# Altium PCB PCB1.PcbDoc
Units mm, origin at the board's own origin, x right, y up, seen from the top; angles counter-clockwise.
Board outline 17.78 x 33.02 mm, 4 copper layers (Top Copper, GND Layer, PW Player, Bottom Copper), stack 1.17 mm thick; 29 components, 18 nets, 98 pads, 47 vias.
Unrouted connection lines stored in the file: 3.
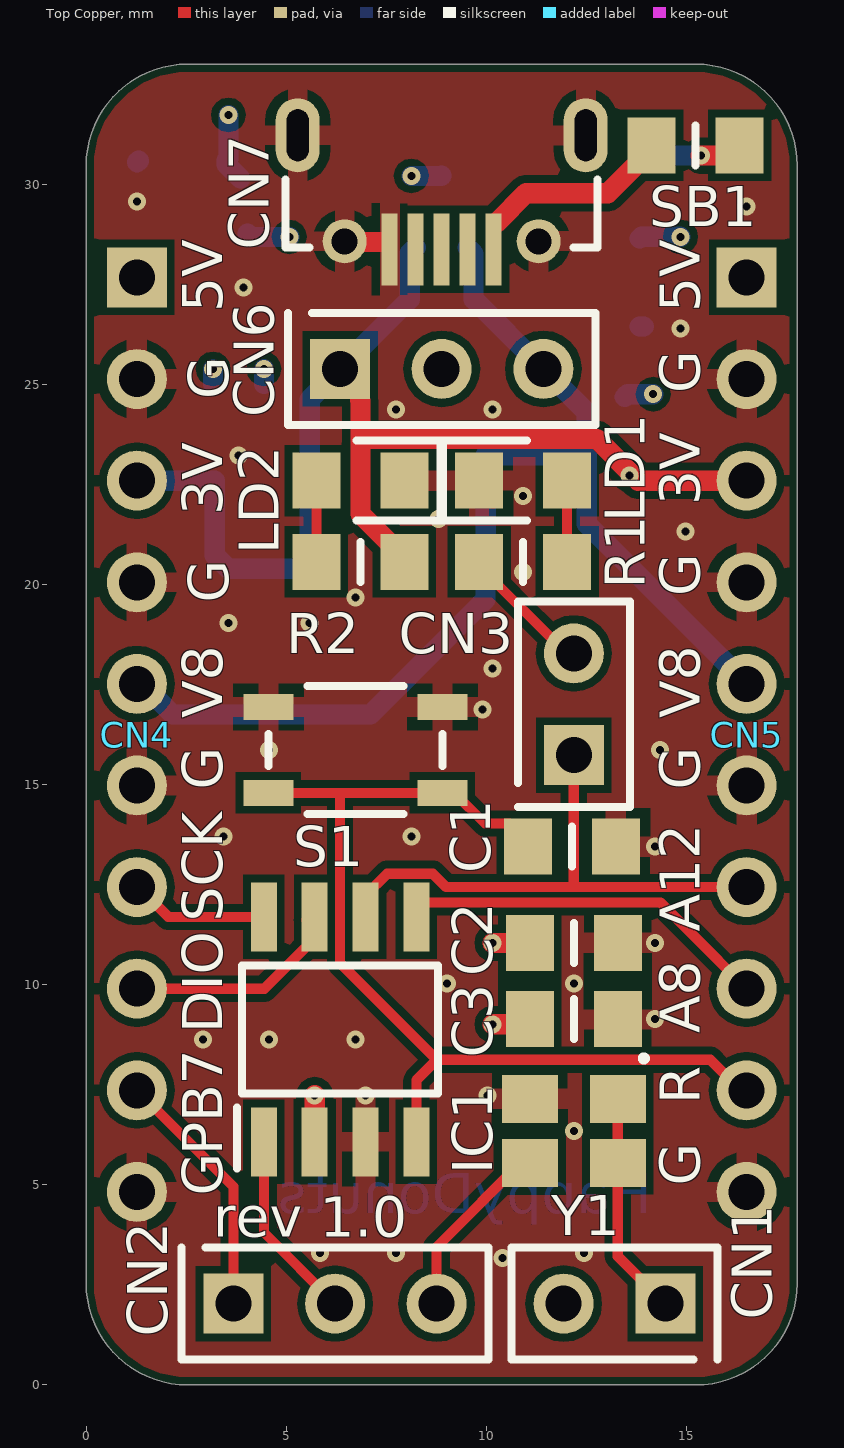
[diagram p0: Top Copper view]
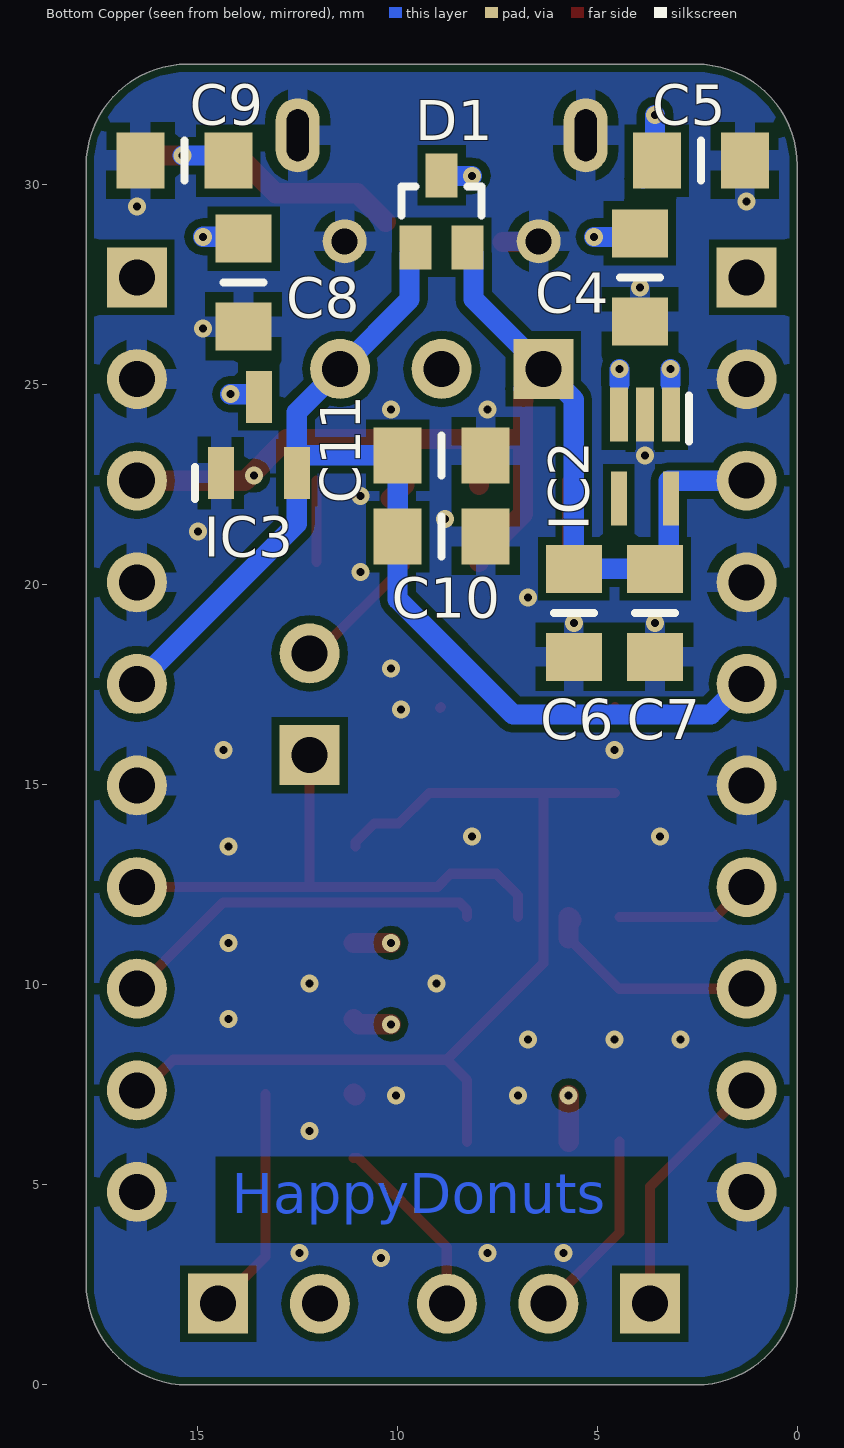
[diagram p1: Bottom Copper view, seen from below]
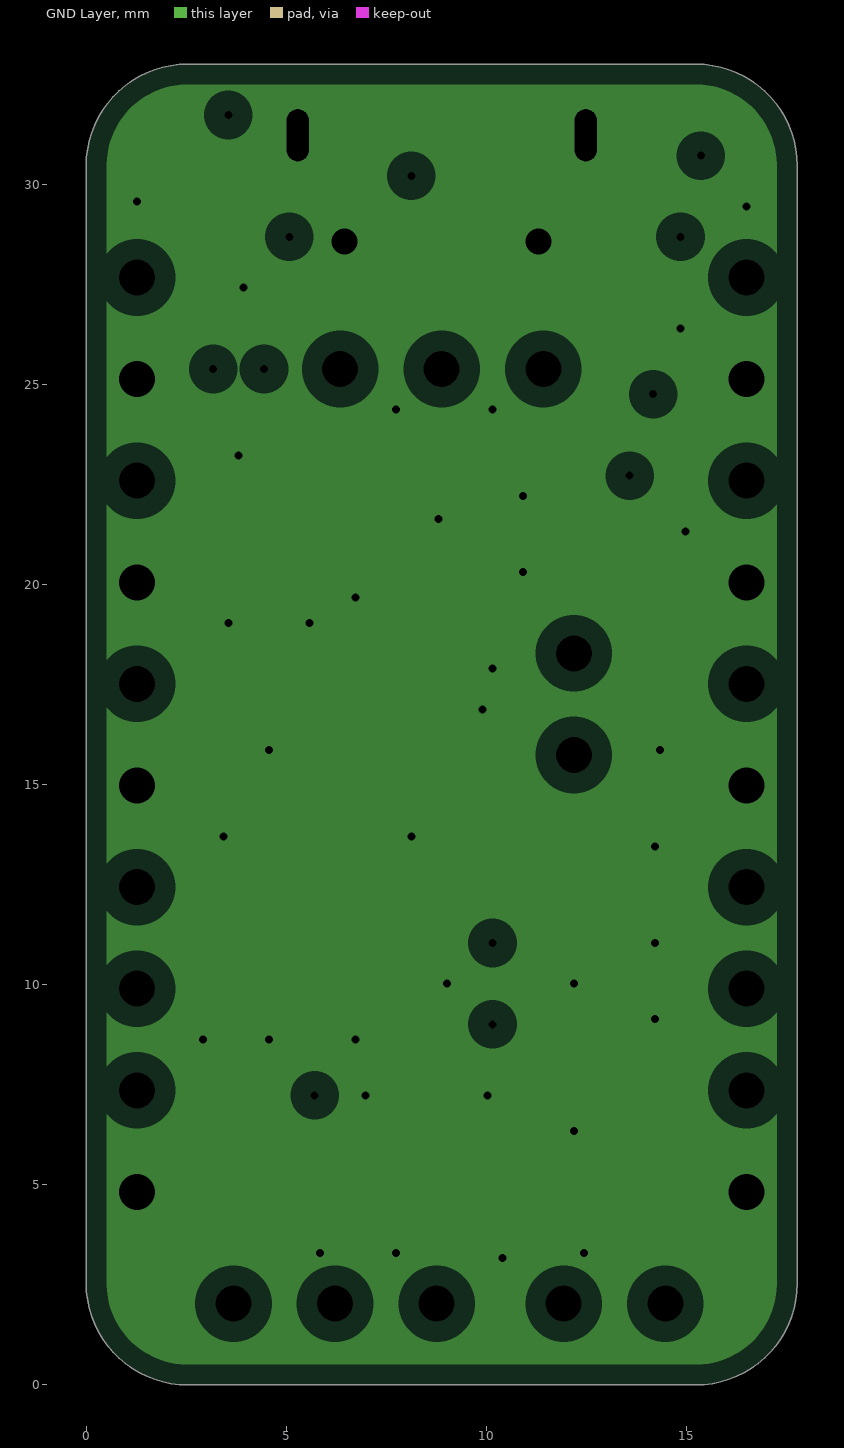
[diagram p2: GND Layer, clearances drawn from the general rule]
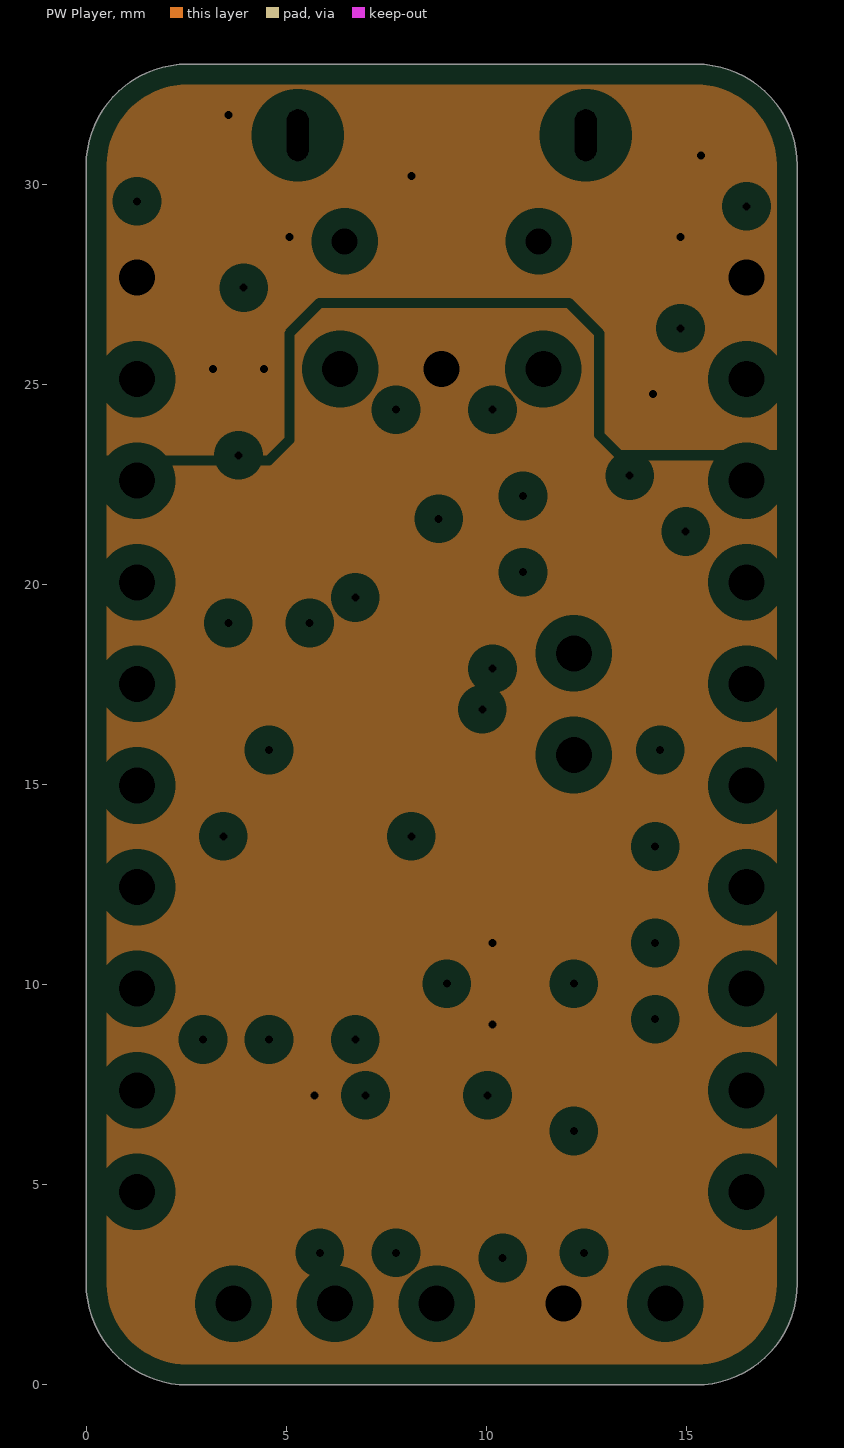
[diagram p3: PW Player, clearances drawn from the general rule]
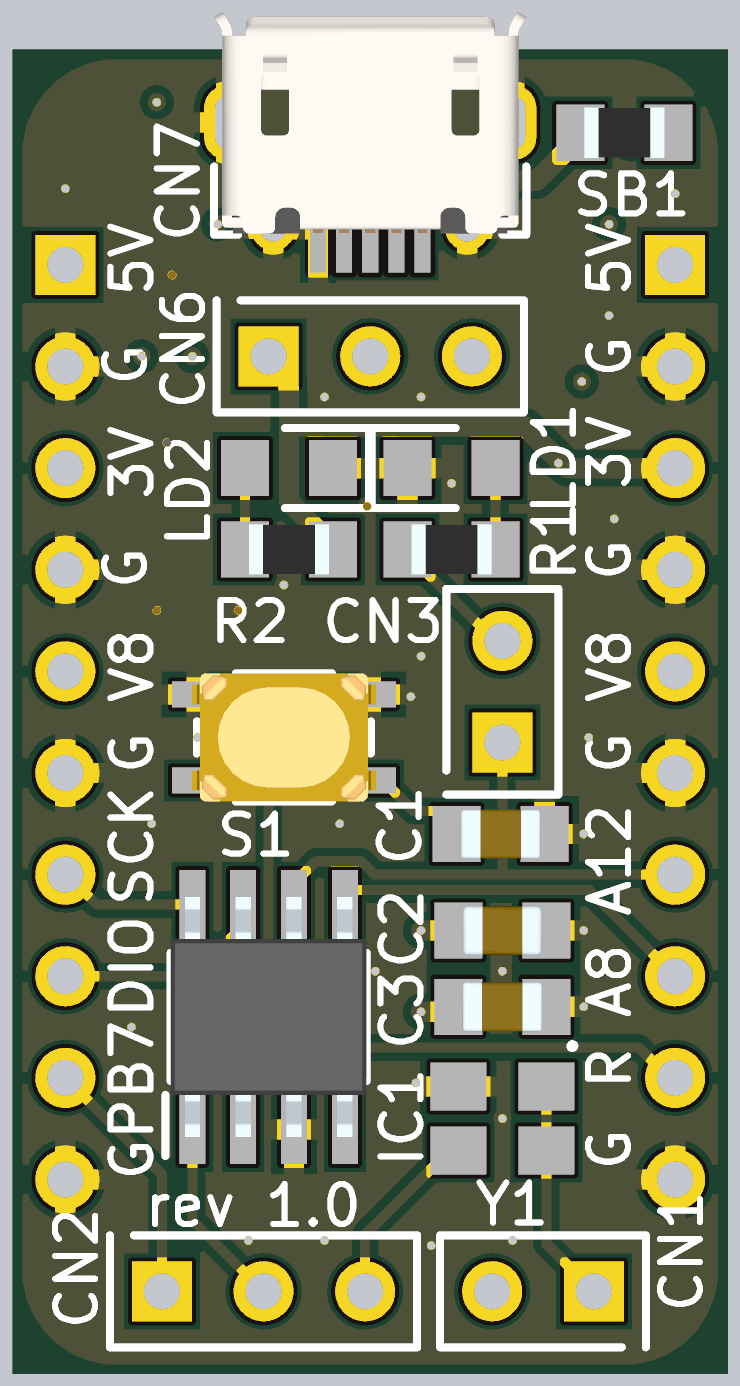
[diagram p4: 3D render of the assembled board from above, using the file's embedded part models]
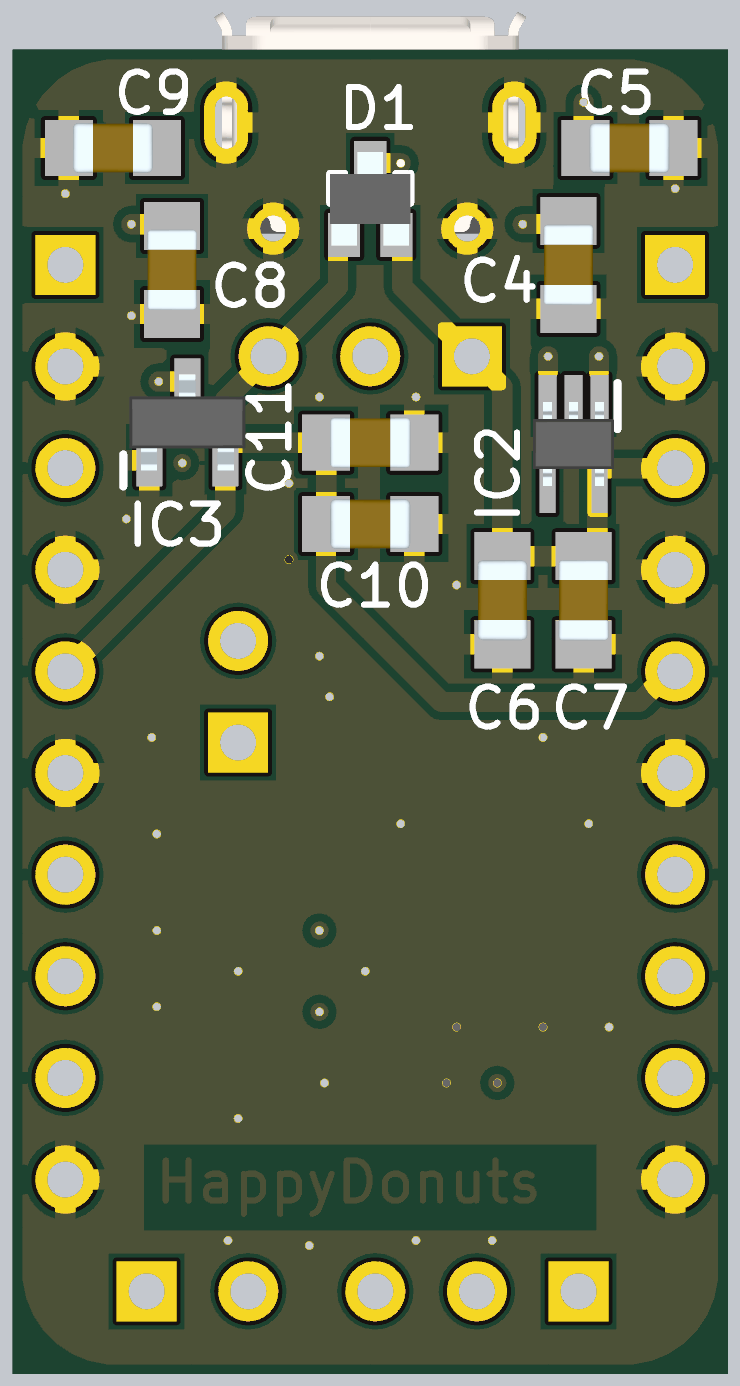
[diagram p5: 3D render of the assembled board from below, using the file's embedded part models]

## Layer stack, top to bottom
Top Mask: solder mask 0.015, Solder Resist, Dk 3.8
Top Copper: signal copper 0.035
Dielectric 1: prepreg 0.2, 7628, Dk 4.6
GND Layer: plane copper 0.0175, net GND
Core: core 0.665, FR-4, Dk 4.5
PW Player: plane copper 0.0175, net (Multiple Nets)
Dielectric 2: prepreg 0.2, 7628, Dk 4.6
Bottom Copper: signal copper 0.035
Bottom Mask: solder mask 0.015, Solder Resist, Dk 3.8

## Board outline
0,2.54 0,30.48 cw(c2.54,30.48) 2.54,33.02 15.24,33.02 cw(c15.24,30.48) 17.78,30.48 17.78,2.54 cw(c15.24,2.54) 15.24,0 2.54,0 cw(c2.54,2.54)

## Design rules (kind name [scope] priority, off if disabled: settings)
BoardOutlineClearance [All] p1: gap=0.2 ignorepadtopadclearanceinfootprint=FALSE except(0.4: Arc-SplitBarrior Arc-SplitContinuation Track-SplitBarrior Track-SplitContinuation SMDPad-SplitBarrior SMDPad-SplitContinuation THPad-SplitBarrior THPad-SplitContinuation Via-SplitBarrior Via-SplitContinuation Fill-SplitBarrior Fill-SplitContinuation Poly-SplitBarrior Poly-SplitContinuation Region-SplitBarrior Region-SplitContinuation Text-SplitBarrior Text-SplitContinuation)
Clearance "Clearance Bottom Layer" [OnLayer('Bottom Layer')] p1: gap=0.203 ignorepadtopadclearanceinfootprint=TRUE except(0.254: Arc-Text Track-Text SMDPad-Text THPad-Text Via-Text Fill-Text Poly-Text Region-Text Text-Text)
Clearance "Clearance Top Layer" [OnLayer('Top Layer')] p2: gap=0.203 ignorepadtopadclearanceinfootprint=TRUE except(0.254: Arc-Text Track-Text SMDPad-Text THPad-Text Via-Text Fill-Text Poly-Text Region-Text Text-Text)
Clearance [All] p3: gap=0.2 ignorepadtopadclearanceinfootprint=FALSE except(0.089: Arc-Arc Arc-Track Arc-SMDPad Track-Track Track-SMDPad SMDPad-SMDPad; 0.127: Arc-Via Track-Via SMDPad-Via THPad-Via Via-Via; 0.254: Arc-Text Track-Text SMDPad-Text THPad-Text Via-Text Fill-Text Poly-Text Region-Text Text-Text)
HoleSize [All] p1: absolutevalues=TRUE maxlimit=6.3 minlimit=0.2 maxpercent=80.000 minpercent=20.000
MinimumAnnularRing [All] p1: minimumring=0.076
MinimumSolderMaskSliver [All] p1: minsoldermaskwidth=0.1
PlaneClearance [All] p1: clearance=0.508
PlaneConnect [All] p1: pad.planeconnectstyle=Relief pad.reliefexpansion=0.508 pad.reliefentries=4 pad.reliefconductorwidth=0.254 pad.reliefairgap=0.254 via.planeconnectstyle=Direct via.reliefexpansion=0.508 via.reliefentries=4 via.reliefconductorwidth=0.254 via.reliefairgap=0.254
PolygonConnect PolygonConnect_1 [All] p1: thpad.connectstyle=Relief thpad.reliefconductorwidth=0.508 thpad.reliefentries=4 thpad.polygonreliefangle="90 Angle" thpad.airgapwidth=0.254 smdpad.connectstyle=Relief smdpad.reliefconductorwidth=0.508 smdpad.reliefentries=4 smdpad.polygonreliefangle="90 Angle" smdpad.airgapwidth=0.254 via.connectstyle=Direct via.reliefconductorwidth=0.508 via.reliefentries=4 via.polygonreliefangle="90 Angle" via.airgapwidth=0.254
RoutingCorners [All] p1: cornerstyle=Round minsetback=2.54 maxsetback=2.54
RoutingVias [All] p1: holewidth=0.2 width=0.45 viastyle="Through Hole" minholewidth=0.2 minwidth=0.45 maxholewidth=1 maxwidth=2
SilkToSilkClearance [All] p1: silktosilkclearance=0.1
SilkToSolderMaskClearance [IsPad] p1: minsilkscreentomaskgap=0.1 clearancetoexposedcopper=TRUE
SolderMaskExpansion [All] p1: expansion=0.102 istentingtop=FALSE
Width [All] p1: maxlimit=2.54 minlimit=0.089 preferedwidth=0.254 minimp=50.000000 maximp=50.000000 favimp=50.000000
23 further rules are at their usual default settings.

## Components (designator, comment, footprint, x,y, rotation, side; value= is the part's Value field where it differs from the comment)
C1 "C0805C104K5RAC7411" CAPC2012X94N 12.149,13.462 r180 top value=100nF
C2 "CL21A475KPFNNNE" CAPC2012X135N 12.192,11.049 r180 top value=4.7uF
C3 "C0805C104K5RAC7411" CAPC2012X94N 12.192,9.144 r180 top value=100nF
C4 "C0805C104K5RAC7411" CAPC2012X94N 3.937,27.686 r90 bottom value=100nF
C5 "885012107015" CAPC2012X135N 2.413,30.607 r0 bottom value=1uF
C6 "885012107015" CAPC2012X135N 5.588,19.304 r90 bottom value=1uF
C7 "C0805C104K5RAC7411" CAPC2012X94N 3.556,19.304 r90 bottom value=100nF
C8 "C0805C104K5RAC7411" CAPC2012X94N 13.843,27.559 r90 bottom value=100nF
C9 "885012107015" CAPC2012X135N 15.324,30.607 r180 bottom value=1uF
C10 "885012107015" CAPC2012X135N 8.89,21.209 r0 bottom value=1uF
C11 "C0805C104K5RAC7411" CAPC2012X94N 8.89,23.241 r0 bottom value=100nF
CN1 "CN_2PIN" CN_2PIN 14.478,2.032 r180 top
CN2 "CN_3PIN" CN_3PIN 3.683,2.032 r0 top
CN3 "CN_2PIN" CN_2PIN 12.192,15.748 r90 top
CN4 "CN_10PIN" CN_10PIN 1.27,27.686 r270 top
CN5 "CN_10PIN" CN_10PIN 16.51,27.686 r270 top
CN6 "CN_3PIN" CN_3PIN 6.35,25.4 r0 top
CN7 "USB_B_AE" USB_B_AE 8.89,31.242 r180 top
D1 "RB715UMTL" DAN217UMTL 8.89,29.337 r180 bottom
IC1 "STM32G031J6M6" SOIC127P600X175-8N 6.35,8.89 r90 top
IC2 "MIC5366-3.3YC5-TR" SOT65P210X110-5N 3.81,23.207 r270 bottom value=3.3V/150mA
IC3 "AP2120N-1.8TRG1" SOT95P230X110-3N 13.462,23.749 r90 bottom value=1.8V/150mA
LD1 "LTST-C171KSKT" LEDC2012X85N_Y 10.922,22.606 r0 top value=Yellow/20mA
LD2 "LTST-C171KGKT" LEDC2012X85N_G 6.858,22.606 r180 top value=Green/20mA
R1 "RC0805FR-07510RL" RESC2012X60N 10.922,20.574 r0 top value=510
R2 "RC0805FR-07510RL" RESC2012X60N 6.858,20.574 r180 top value=510
S1 "PTS815_SJM_250_SMTR_LFS" PTS815SJM250SMTRLFS 6.731,15.875 r0 top
SB1 "RC0805FR-070RL" RESC2012X60N 15.24,30.988 r0 top
Y1 "ASEKDV-32.768kHz-LC-T" ASEKDV-32.768kHz-LC-T 12.192,6.35 r180 top value=32.768kHz

## Footprints (in the part's own frame and the unit in brackets; to place one, negate y for a bottom-side part, rotate by r counter-clockwise, add the part's x,y. Pads: shape width x height; smd on the part's side, far side on the other; paste and mask are expansions set on the pad)
ASEKDV-32.768kHz-LC-T [mm]
  rect 1.4x1.2 smd: 1(-1.1,-0.8) 2(1.1,-0.8) 3(1.1,0.8) 4(-1.1,0.8)
  silkscreen extent -1.8,-1.86 -1.7,-1.76, body extent -1.6,-1.25 1.6,1.25, height 1.2
CAPC2012X94N [mm]
  rect 1.2x1.4 smd: 1(-1.1,0) 2(1.1,0)
  silkscreen extent 0,-0.5 0,0.5, body extent -1,-0.63 1,0.63, height 0.94
CAPC2012X135N [mm]
  rect 1.2x1.4 smd: 1(-1.1,0) 2(1.1,0)
  silkscreen extent 0,-0.5 0,0.5, body extent -1,-0.63 1,0.63, height 1.35
CN_2PIN [mm] "Connector; Edge; 22 Position"
  rect 1.5x1.5 hole 0.9: 1(0,0)
  round 1.5 hole 0.9: 2(2.54,0)
  silkscreen extent -1.3,-1.4 3.84,1.4, body extent -1.17,-1.25 3.91,1.25, height 8.2
CN_3PIN [mm] "Connector; Edge; 22 Position"
  rect 1.5x1.5 hole 0.9: 1(0,0)
  round 1.5 hole 0.9: 2(2.54,0) 3(5.08,0)
  silkscreen extent -1.3,-1.4 6.38,1.4, body extent -1.17,-1.25 6.45,1.25, height 8.2
CN_10PIN [mm] "Connector; Edge; 22 Position"
  rect 1.5x1.5 hole 0.9: 1(0,0)
  round 1.5 hole 0.9: 2(2.54,0) 3(5.08,0) 4(7.62,0) 5(10.16,0) 6(12.7,0) 7(15.24,0) 8(17.78,0) 9(20.32,0) 10(22.86,0)
  body extent -1.17,-1.25 24.23,1.25, height 1.8
DAN217UMTL [mm]
  rect 0.8x1.1 smd: 1(-0.65,-0.9) 2(0.65,-0.9) 3(0,0.9)
  silkscreen extent -1,-0.1 1,0.63, body extent -1,-1.17 1,1.17, height 1.1
LEDC2012X85N_G [mm]
  rect 1.2x1.4 smd: 1(-1.1,0) 2(1.1,0)
  silkscreen extent -2,-1 0.1,1, body extent -1,-0.63 1,0.63, height 1.1
LEDC2012X85N_Y [mm]
  rect 1.2x1.4 smd: 1(-1.1,0) 2(1.1,0)
  silkscreen extent -2,-1 0.1,1, body extent -1,-0.63 1,0.63, height 1.1
PTS815SJM250SMTRLFS [mm]
  rect 1.25x0.65 smd: 1(-2.175,1.075) 2(2.175,1.075) 3(-2.175,-1.075) 4(2.175,-1.075)
  silkscreen extent -2.17,-1.6 2.17,1.6, body extent -2.3,-1.6 2.3,1.6, height 2.64
RESC2012X60N [mm]
  rect 1.2x1.4 smd: 1(-1.1,0) 2(1.1,0)
  silkscreen extent 0,-0.5 0,0.5, body extent -1,-0.63 1,0.63, height 0.6
SOIC127P600X175-8N [mm]
  rect 1.725x0.65 smd: 1(-2.812,1.905) 2(-2.812,0.635) 3(-2.812,-0.635) 4(-2.812,-1.905) 5(2.812,-1.905) 6(2.812,-0.635) 7(2.812,0.635) 8(2.812,1.905)
  silkscreen extent -3.47,-2.45 1.6,2.58, body extent -3,-2.45 3,2.45, height 1.75
SOT65P210X110-5N [mm]
  rect 1.35x0.45 smd: 1(-1.05,0.65) 2(-1.05,0) 3(-1.05,-0.65)
  rect 1.35x0.4 smd: 4(1.05,-0.65) 5(1.05,0.65)
  silkscreen extent -1.53,1.1 -0.38,1.1, body extent -1.05,-1.01 1.05,1.01, height 1.1
SOT95P230X110-3N [mm]
  rect 1.3x0.65 smd: 1(-0.95,0.95) 2(-0.95,-0.95) 3(0.95,0)
  silkscreen extent -1.6,1.6 -0.8,1.6, body extent -1.2,-1.45 1.2,1.45, height 1.2
USB_B_AE [mm]
  rect 0.4x1.8 smd mask+0.125: 1(-1.3,2.85) 2(-0.65,2.85) 3(0,2.85) 4(0.65,2.85) 5(1.3,2.85)
  round 1.1 hole 0.65: S1(2.425,2.65) S4(-2.425,2.65)
  oval 1.1x1.85 hole 0.55 slot 1.3 at 90 deg: S2(3.6,0) S3(-3.6,0)
  silkscreen extent -3.9,1.1 3.9,2.8, body extent -3.9,-2.77 3.9,2.77, height 2.49

## Part data
C1 C3 C4 C7 C8 C11: "Capacitor", Manufacturer_Name=Kemet, Mouser Part Number=80-C0805C104K5RACLR, Arrow Part Number=C0805C104K5RAC7411, Arrow Price/Stock=https://www.arrow.com/en/products/c0805c104k5rac7411/kemet-corporation, Datasheet Link=https://www.mouser.com/datasheet/2/212/KEM_C1002_X7R_SMD-1102033.pdf, Height=0.88mm, Manufacturer_Part_Number=C0805C104K5RAC7411, Mouser Price/Stock=https://www.mouser.co.uk/ProductDetail/KEMET/C0805C104K5RAC7411?qs=jbRM9o5BbzPcVXF0wW9AYg%3D%3D
C2: "Capacitor", Manufacturer_Name="Wurth Elektronik", Mouser Part Number=187-CL21A475KPFNNNE, Datasheet Link=https://www.mouser.fr/datasheet/2/585/MLCC-1837944.pdf, Height=1.35mm, Manufacturer_Part_Number=CL21A475KPFNNNE, Mouser Price/Stock=https://www.mouser.co.uk/ProductDetail/Wurth-Elektronik/885012107015?qs=0KOYDY2FL2%252BNQREZP%252BtVoQ%3D%3D
C5 C6 C9 C10: "Capacitor", Manufacturer_Name="Wurth Elektronik", Mouser Part Number=710-885012107015, Datasheet Link=https://katalog.we-online.com/pbs/datasheet/885012107015.pdf, Height=1.35mm, Manufacturer_Part_Number=885012107015, Mouser Price/Stock=https://www.mouser.co.uk/ProductDetail/Wurth-Elektronik/885012107015?qs=0KOYDY2FL2%252BNQREZP%252BtVoQ%3D%3D
CN1 CN2 CN3 CN4 CN5 CN6: "Connector"
CN7: "USB connector"
D1: "Schottky Diode", Manufacturer_Name="ROHM Semiconductor", Mouser Part Number=755-RB715UMTL, Datasheet Link=http://uk.rs-online.com/web/p/products/1835297, Height=1mm, Manufacturer_Part_Number=RB715UMTL, Mouser Price/Stock=https://www.mouser.co.uk/ProductDetail/ROHM-Semiconductor/RB715UMTL?qs=HXFqYaX1Q2wTXMfu8QxCQg%3D%3D
IC1: "Integrated Circuit", Manufacturer_Name=STMicroelectronics, Mouser Part Number=511-STM32G031J6M6, Datasheet Link=https://www.mouser.fr/datasheet/2/389/dm00613879-1799607.pdf, Height=1.75mm, Manufacturer_Part_Number=STM32G031J6M6
IC2: "LDO", Arrow Part Number=MIC5365-3.3YC5-TR, Manufacturer_Name=Microchip, Mouser Part Number=998-MIC5366-3.3YC5TR, Arrow Price/Stock=https://www.arrow.com/en/products/mic5365-3.3yc5-tr/microchip-technology?region=nac, Datasheet Link=https://www.mouser.fr/datasheet/2/268/MIC5365_6_High_Performance_Single_150mA_LDO_DS2000-2826882.pdf, Height=1.1mm, Manufacturer_Part_Number=MIC5366-3.3YC5-TR, Mouser Price/Stock=https://www.mouser.co.uk/ProductDetail/Microchip-Technology-Micrel/MIC5365-33YC5-TR?qs=U6T8BxXiZAXvJj%252BPZ%252B301w%3D%3D
IC3: "LDO", Manufacturer_Name="Diodes Inc.", Mouser Part Number=621-AP2120N-1.8TRG1, Arrow Part Number=AP2120N-1.8TRG1, Arrow Price/Stock=https://www.arrow.com/en/products/ap2120n-1.8trg1/diodes-incorporated, Datasheet Link=https://datasheet.datasheetarchive.com/originals/distributors/Datasheets_SAMA/eefff3041187ea13496cd4a0771f8fec.pdf, Height=1.1mm, Manufacturer_Part_Number=AP2120N-1.8TRG1, Mouser Price/Stock=https://www.mouser.co.uk/ProductDetail/Diodes-Incorporated/AP2120N-18TRG1?qs=x6A8l6qLYDC3T4tUK6BUJA%3D%3D
LD1: "LED", Manufacturer_Name=Lite-On, Mouser Part Number=859-LTST-C171KSKT, Arrow Part Number=LTST-C171KSKT, Arrow Price/Stock=https://www.arrow.com/en/products/ltst-c171kskt/lite-on-technology?region=nac, Datasheet Link=https://componentsearchengine.com/Datasheets/1/LTST-C171KSKT.pdf, Height=0.9mm, Manufacturer_Part_Number=LTST-C171KSKT, Mouser Price/Stock=https://www.mouser.co.uk/ProductDetail/Lite-On/LTST-C171KSKT?qs=llMtm9xcdM0CwR1bByTaUQ%3D%3D
LD2: "LED", Manufacturer_Name=Lite-On, Mouser Part Number=859-LTST-C171KGKT, Arrow Part Number=LTST-C171KGKT, Arrow Price/Stock=https://www.arrow.com/en/products/ltst-c171kgkt/lite-on-technology?region=nac, Datasheet Link=https://optoelectronics.liteon.com/upload/download/DS22-2000-118/LTST-C171KGKT.pdf, Height=0.9mm, Manufacturer_Part_Number=LTST-C171KGKT, Mouser Price/Stock=https://www.mouser.co.uk/ProductDetail/Lite-On/LTST-C171KGKT?qs=j1zysehuyChA38z%2F%252BFfUSw%3D%3D
R1 R2: "Resistor", Manufacturer_Name="YAGEO (PHYCOMP)", Mouser Part Number=603-RC0805FR-07510RL, Datasheet Link=https://datasheet.datasheetarchive.com/originals/distributors/Datasheets_SAMA/902f9e387b938f871d31120f5fc1d65e.pdf, Height=0.6mm, Manufacturer_Part_Number=RC0805FR-07510RL, Mouser Price/Stock=https://www.mouser.com/Search/Refine.aspx?Keyword=603-RC0805FR-07510RL
S1: "Switch", Arrow Part Number="PTS815 SJM 250 SMTR LFS", Manufacturer_Name="C & K COMPONENTS", Mouser Part Number=611-PTS815SJM250SMTR, Arrow Price/Stock=https://www.arrow.com/en/products/pts815-sjm-250-smtr-lfs/ck, Datasheet Link="https://componentsearchengine.com/Datasheets/1/PTS815 SJM 250 SMTR LFS.pdf", Height=2.7mm, Manufacturer_Part_Number="PTS815 SJM 250 SMTR LFS", Mouser Price/Stock=https://www.mouser.co.uk/ProductDetail/CK/PTS815-SJM-250-SMTR-LFS?qs=ahcBuItHZ3xKWmfV%2F2E6bA%3D%3D
SB1: "Jumper (0 ohm)", Manufacturer_Name="YAGEO (PHYCOMP)", Mouser Part Number=603-RC0805FR-070RL, Datasheet Link=https://datasheet.datasheetarchive.com/originals/distributors/Datasheets_SAMA/902f9e387b938f871d31120f5fc1d65e.pdf, Height=0.6mm, Manufacturer_Part_Number=RC0805FR-070RL, Mouser Price/Stock=https://www.mouser.co.uk/ProductDetail/YAGEO/RC0805FR-070RL?qs=fRxXYNj8ftF6kXqh1XbZJQ%3D%3D
Y1: "Crystal or Oscillator", Manufacturer_Name=ABRACON, Mouser Part Number=815-ASEKDV32768KHLCT, Datasheet Link=https://www.mouser.fr/datasheet/2/3/ABRC_S_A0012625913_1-2519507.pdf, Height=1.2mm, Manufacturer_Part_Number=ASEKDV-32.768kHz-LC-T

## Via types
v1: diameter 0.45, hole 0.2, Top Copper to Bottom Copper, tented both sides, 47 vias

## Nets (pads, with @x,y where several pads share a name; then routed paths per layer and width w, separated by ;. In a path a pad name is that pad's centre, name@x,y a point inside that pad or via, vN(x,y) a via of type N, cw(c..) or ccw(c..) an arc to the next point about the centre after c; other vN are vias at no path point)
1V8: C10.2 C11.2 CN4.5 CN5.5 CN6.3 D1.1 IC3.2 | length 30.2
  Bottom Copper w0.5: CN4.5 1.397,17.526 2.159,16.764 7.112,16.764 9.99,19.642 C10.2 ; D1.1 9.69,28.287 9.69,27.14 CN6.3
  Bottom Copper w0.508: C10.2 C11.2 12.395,23.241 IC3.2@12.512,23.124 ; CN6.3 12.512,24.318 IC3.2@12.512,23.124 ; CN5.5 12.512,21.524 IC3.2 IC3.2@12.512,23.124
3V3: C6.2 C7.2 CN4.3 CN5.3 CN6.1 D1.2 IC2.5 R2.1 | length 31.8
  Top Copper w0.508: CN6.1 6.846,24.904 6.846,24.618 6.858,24.606 6.858,23.622 ; R2.1 7.958,20.674 6.858,21.774 6.858,23.622 ; CN5.3 13.807,22.606 12.764,23.649 6.885,23.649 6.858,23.622
  Bottom Copper w0.508: CN4.3@1.27,22.59 CN4.3 3.214,22.606 3.214,20.746 C7.2 C6.2 5.588,24.638 CN6.1 ; CN6.1@6.846,24.904 CN6.1 ; D1.2 8.094,28.291 8.094,27.144 CN6.1
  other v1: 13.589,22.733
5V: C4.2 C5.2 C8.2 C9.2 CN4.1 CN5.1 D1.3 IC2.1 IC2.3 IC3.3 SB1.2 | length 8.4
  Top Copper w0.508: v1(15.367,30.734) 16.086,30.734 SB1.2
  Bottom Copper w0.5: 3.175,25.019 v1(3.175,25.4) ; v1(3.556,31.75) 3.556,30.65 C5.2 3.513,30.507 C5.2@3.863,30.157 ; C4.2@4.037,28.786 4.121,28.702 v1(5.08,28.702) ; 4.445,25.019 v1(4.445,25.4) ; v1(8.128,30.226) 8.879,30.226 D1.3
  Bottom Copper w0.508: IC3.3 13.532,24.769 v1(14.176,24.769) ; C8.2 13.886,28.702 v1(14.859,28.702) ; C9.2 14.351,30.734 v1(15.367,30.734)
GND: C1.1 C2.1 C3.1 C4.1 C5.1 C6.1 C7.1 C8.1 C9.1 C10.1 C11.1 CN4.2 CN4.4 CN4.6 CN4.10 CN5.2 CN5.4 CN5.6 CN5.10 CN7.5 CN7.S1 CN7.S2 CN7.S3 CN7.S4 IC1.3 IC2.2 IC3.1 LD1.1 LD2.1 S1.1 S1.2 Y1.2 | length 2
  Top Copper w0.254: S1.1 S1.1@4.572,16.934 ; S1.2 S1.2@8.935,16.92 ; LD1.1@10.168,22.16 LD1.1@10.23,22.098
  Top Copper w0.508: CN7.S1 6.482,28.575 7.366,28.575 ; LD2.1@7.958,22.506 LD2.1 ; LD1.1 9.822,22.506 LD1.1@10.168,22.16 ; Y1.2@11.054,7.239 Y1.2@11.092,7.277
  Bottom Copper w0.508: C5.1@1.27,30.564 C5.1 ; C8.1 C8.1@13.943,26.459
  other v1: 10.414,3.175 5.842,3.302 7.747,3.302 12.446,3.302 12.192,6.35 6.985,7.239 10.033,7.239 2.921,8.636 4.572,8.636 6.731,8.636 14.224,9.144 9.017,10.033 12.192,10.033 14.224,11.049 14.224,13.462 3.429,13.716 8.128,13.716 4.572,15.875 14.351,15.875 9.906,16.891 10.16,17.907 3.556,19.05 5.588,19.05 6.731,19.685 10.922,20.32 14.986,21.336 8.812,21.652 10.922,22.225 3.81,23.241 7.747,24.384 10.16,24.384 14.859,26.416 3.937,27.432 16.51,29.464 1.27,29.591
NetCN1_1: CN1.1 Y1.1 Y1.4 | length 5.7
  Top Copper w0.254: Y1.1@13.292,7.277 13.292,5.677 13.292,3.218 CN1.1
NetCN2_2: CN2.2 IC1.1 | length 4.8
  Top Copper w0.254: IC1.1 4.445,3.81 CN2.2
NetCN2_3: CN2.3 Y1.3 | length 4.7
  Top Copper w0.254: CN2.3 8.763,3.448 10.992,5.677 Y1.3@11.092,5.677
NetCN3_2: CN3.2 R1.1 | length 3.4
  Top Copper w0.254: R1.1 9.822,20.474 12.008,18.288 CN3.2
NetCN7_1: CN7.1 SB1.1 | length 4.7
  Top Copper w0.508: CN7.1@10.288,29.082 10.996,29.79 13.042,29.79 14.14,30.888 SB1.1
NetLD1_2: LD1.2 R1.2 | length 2
  Top Copper w0.254: R1.2 LD1.2
NetLD2_2: LD2.2 R2.2 | length 2
  Top Copper w0.254: R2.2 LD2.2
NRST: C1.2 CN5.9 IC1.4 S1.3 S1.4 | length 25.1
  Top Copper w0.254: S1.3 6.35,14.8 ; IC1.4 8.255,7.62 8.763,8.128 ; C1.2 11.049,13.562 10.576,14.035 9.971,14.035 9.206,14.8 S1.4 6.35,14.8 ; CN5.9 16.364,7.366 15.602,8.128 8.763,8.128 ; 6.35,14.8 6.35,10.541 8.763,8.128
PA8: CN5.8 IC1.5 | length 9.4
  Top Copper w0.254: IC1.5 8.255,11.867 8.453,12.065 14.351,12.065 15.127,11.289 CN5.8
PA12: CN3.1 CN5.7 IC1.6 | length 13.7
  Top Copper w0.254: IC1.6 6.985,12.24 7.526,12.78 8.669,12.78 9.004,12.446 12.192,12.446 ; CN3.1 12.192,12.446 ; CN5.7 12.192,12.446
PB7: CN2.1 CN4.9 | length 6.3
  Top Copper w0.254: CN4.9 3.683,4.953 CN2.1
SWCLK: CN4.7 IC1.8 | length 3.5
  Top Copper w0.254: CN4.7@1.309,12.446 2.053,11.702 IC1.8
  Top Copper w0.381: CN4.7 CN4.7@1.309,12.446
SWDIO: CN4.8 IC1.7 | length 5.6
  Top Copper w0.254: CN4.8 4.456,9.906 IC1.7@5.715,11.165
  Top Copper w0.5: IC1.7@5.64,11.627 IC1.7 IC1.7@5.715,11.165
VDD: C2.2 C3.2 CN1.2 CN6.2 IC1.2 | length 3.1
  Top Copper w0.508: IC1.2 v1(5.715,7.239) ; v1(10.16,9.017) 10.965,9.017 C3.2 ; v1(10.16,11.049) C2.2
pads on no net: CN7.2 CN7.3 CN7.4 IC2.4

## Polygon pours and split planes (outlines as drawn)
GND on Bottom Copper "Bottom Copper-GND" (solid, pour order 1): 2.54,0 cw(c2.54,2.54) 0,2.54 0,30.48 cw(c2.54,30.48) 2.54,33.02 15.24,33.02 cw(c15.24,30.48) 17.78,30.48 17.78,2.54 cw(c15.24,2.54) 15.24,0
GND on Top Copper "Top Copper-GND" (solid, pour order 0): 0,2.54 0,30.48 cw(c2.54,30.48) 2.54,33.02 15.24,33.02 cw(c15.24,30.48) 17.78,30.48 17.78,2.54 cw(c15.24,2.54) 15.24,0 2.54,0 cw(c2.54,2.54)
VDD on PW Player (split plane): 12.698,26.235 12.698,23.749 12.707,23.699 12.735,23.657 13.243,23.149 13.285,23.121 13.335,23.112 17.27,23.112 17.27,2.54 17.271,2.524 17.262,2.341 17.233,2.144 17.184,1.95 17.117,1.762 17.032,1.582 16.929,1.411 16.811,1.251 16.677,1.103 16.529,0.969 16.369,0.851 16.198,0.748 16.018,0.663 15.83,0.596 15.636,0.547 15.439,0.518 15.256,0.509 15.24,0.51 2.54,0.51 2.524,0.509 2.341,0.518 2.144,0.547 1.95,0.596 1.762,0.663 1.582,0.748 1.411,0.851 1.251,0.969 1.103,1.103 0.969,1.251 0.851,1.411 0.748,1.582 0.663,1.762 0.596,1.95 0.547,2.144 0.518,2.341 0.509,2.524 0.51,2.54 0.51,22.985 4.572,22.985 4.622,22.994 4.664,23.022 5.172,23.53 5.2,23.572 5.209,23.622 5.209,26.235 5.896,26.922 12.011,26.922
5V on PW Player (split plane): 15.439,32.502 15.636,32.473 15.83,32.424 16.018,32.357 16.198,32.272 16.369,32.169 16.529,32.051 16.677,31.917 16.811,31.769 16.929,31.609 17.032,31.438 17.117,31.258 17.184,31.07 17.233,30.876 17.262,30.679 17.271,30.496 17.27,30.48 17.27,23.37 13.389,23.37 12.956,23.803 12.956,26.289 12.947,26.339 12.919,26.381 12.157,27.143 12.115,27.171 12.065,27.18 5.842,27.18 5.792,27.171 5.75,27.143 4.988,26.381 4.96,26.339 4.951,26.289 4.951,23.676 4.518,23.243 0.51,23.243 0.51,30.48 0.509,30.496 0.518,30.679 0.547,30.876 0.596,31.07 0.663,31.258 0.748,31.438 0.851,31.609 0.969,31.769 1.103,31.917 1.251,32.051 1.411,32.169 1.582,32.272 1.762,32.357 1.95,32.424 2.144,32.473 2.341,32.502 2.524,32.511 2.54,32.51 15.24,32.51 15.256,32.511
GND on GND Layer (split plane): 15.439,32.502 15.636,32.473 15.83,32.424 16.018,32.357 16.198,32.272 16.369,32.169 16.529,32.051 16.677,31.917 16.811,31.769 16.929,31.609 17.032,31.438 17.117,31.258 17.184,31.07 17.233,30.876 17.262,30.679 17.271,30.496 17.27,30.48 17.27,2.54 17.271,2.524 17.262,2.341 17.233,2.144 17.184,1.95 17.117,1.762 17.032,1.582 16.929,1.411 16.811,1.251 16.677,1.103 16.529,0.969 16.369,0.851 16.198,0.748 16.018,0.663 15.83,0.596 15.636,0.547 15.439,0.518 15.256,0.509 15.24,0.51 2.54,0.51 2.524,0.509 2.341,0.518 2.144,0.547 1.95,0.596 1.762,0.663 1.582,0.748 1.411,0.851 1.251,0.969 1.103,1.103 0.969,1.251 0.851,1.411 0.748,1.582 0.663,1.762 0.596,1.95 0.547,2.144 0.518,2.341 0.509,2.524 0.51,2.54 0.51,30.48 0.509,30.496 0.518,30.679 0.547,30.876 0.596,31.07 0.663,31.258 0.748,31.438 0.851,31.609 0.969,31.769 1.103,31.917 1.251,32.051 1.411,32.169 1.582,32.272 1.762,32.357 1.95,32.424 2.144,32.473 2.341,32.502 2.524,32.511 2.54,32.51 15.24,32.51 15.256,32.511

## Other copper
Bottom Copper:
  text "HappyDonuts" at 14.138,4.295 h1
PW Player (plane layer: these items are gaps in the copper):
  lines w0.254: 0,23.114 4.572,23.114 5.08,23.622 5.08,26.289 5.842,27.051 12.065,27.051 12.827,26.289 12.827,23.749 13.335,23.241 17.78,23.241

## Silkscreen, mask and mechanical layers (free items; w line width, h text height)
Top Overlay:
  text "5V" at 3.403,26.823 h1 r90
  text "5V" at 15.341,26.823 h1 r90
  text "G" at 15.341,24.791 h1 r90
  text "G" at 3.556,24.638 h1 r90
  text "3V" at 15.341,21.997 h1 r90
  text "3V" at 3.403,21.743 h1 r90
  text "G" at 15.341,19.711 h1 r90
  text "G" at 3.556,19.558 h1 r90
  text "V8" at 3.403,16.663 h1 r90
  text "V8" at 15.341,16.663 h1 r90
  text "G" at 3.403,14.885 h1 r90
  text "G" at 15.341,14.885 h1 r90
  text "SCK" at 3.403,11.583 h1 r90
  text "A12" at 15.341,11.329 h1 r90
  text "DIO" at 3.403,8.789 h1 r90
  text "A8" at 15.341,8.789 h1 r90
  text "R" at 15.341,7.011 h1 r90
  text "PB7" at 3.403,5.741 h1 r90
  text "G" at 15.341,4.979 h1 r90
  text "G" at 3.403,4.725 h1 r90
  text "rev 1.0" at 3.175,3.708 h1
Board Shape:
  the board outline again, w0